# Altium PCB USB_DVI_SW.PcbDoc
Units mil, origin at the board's own origin, x right, y up, seen from the top; angles counter-clockwise.
Board outline 1544.5 x 1455.2 mil, 2 copper layers (Top Layer, Bottom Layer); 25 components, 19 nets, 116 pads, 89 vias.
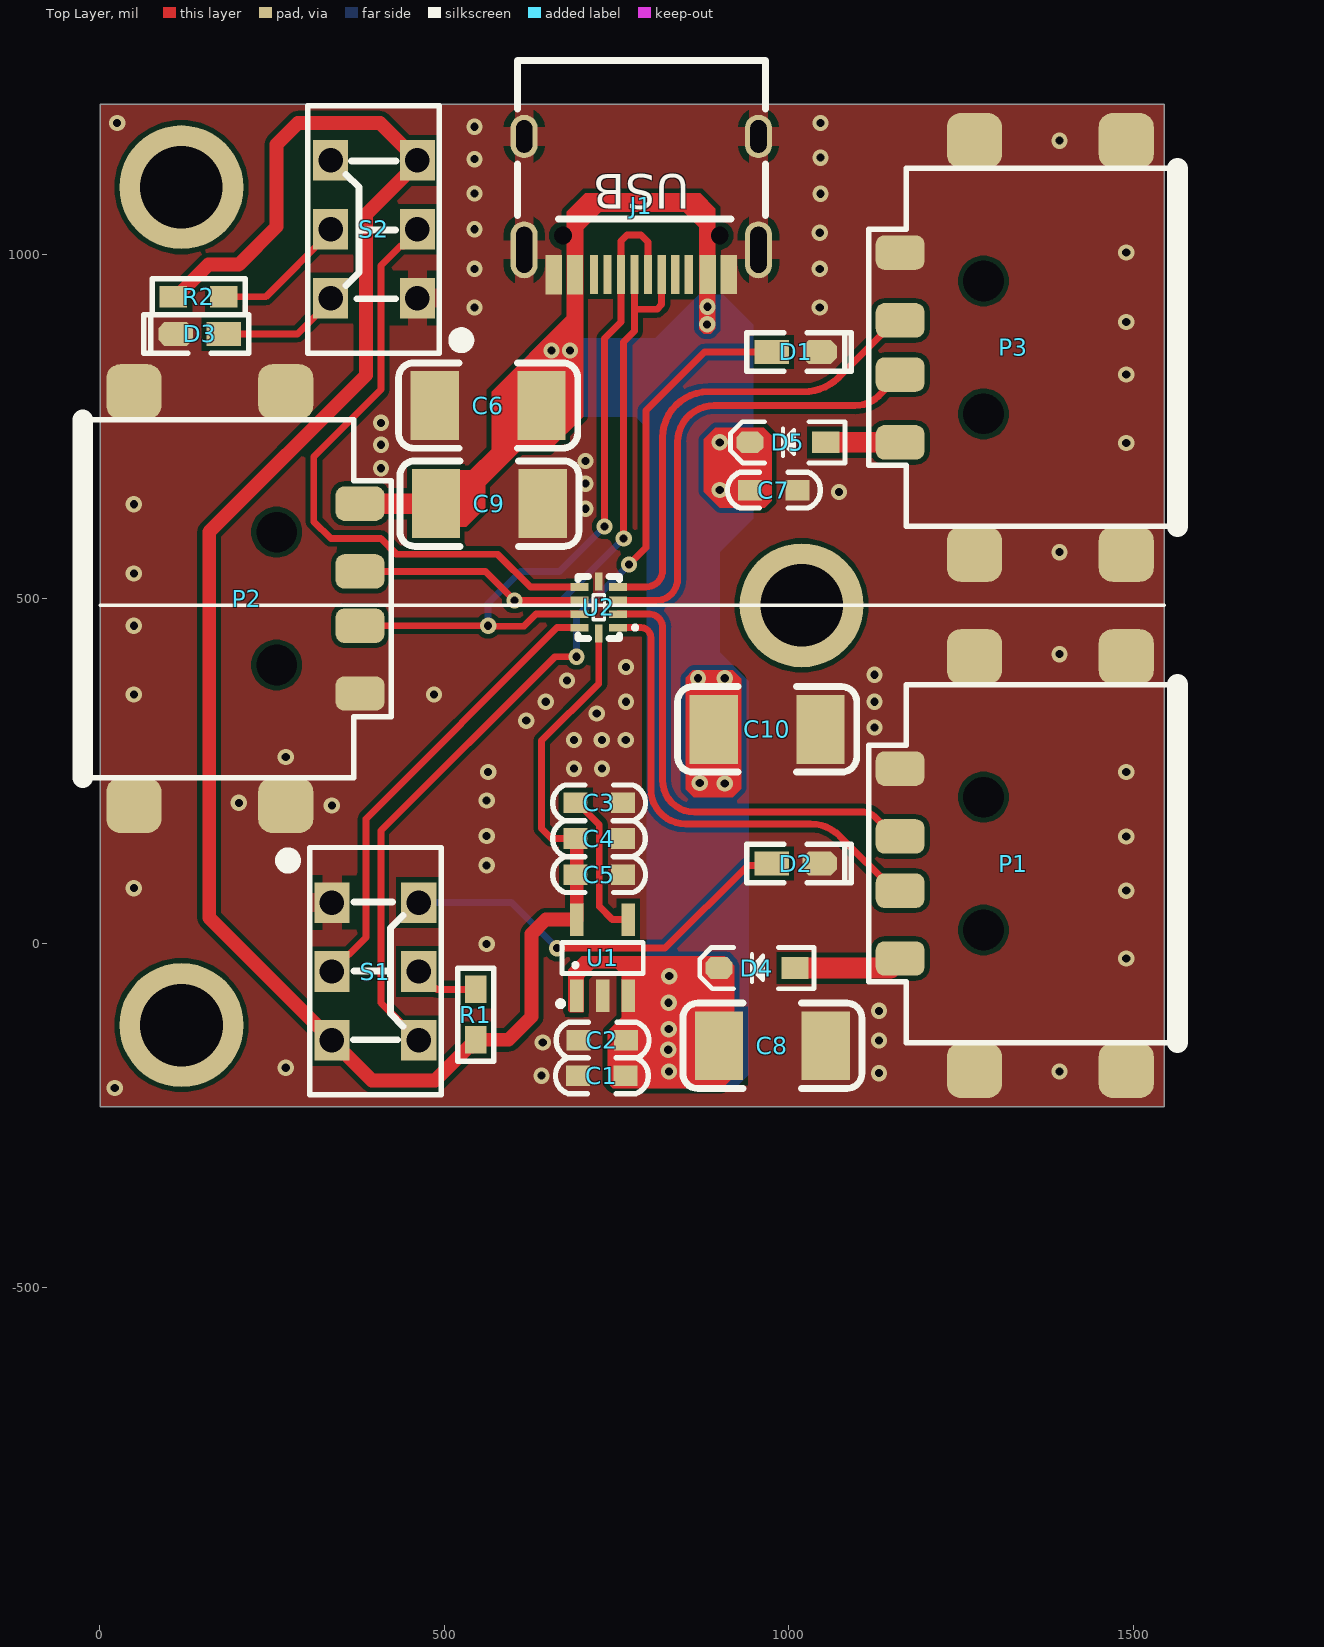
[diagram p0: Top Layer view]
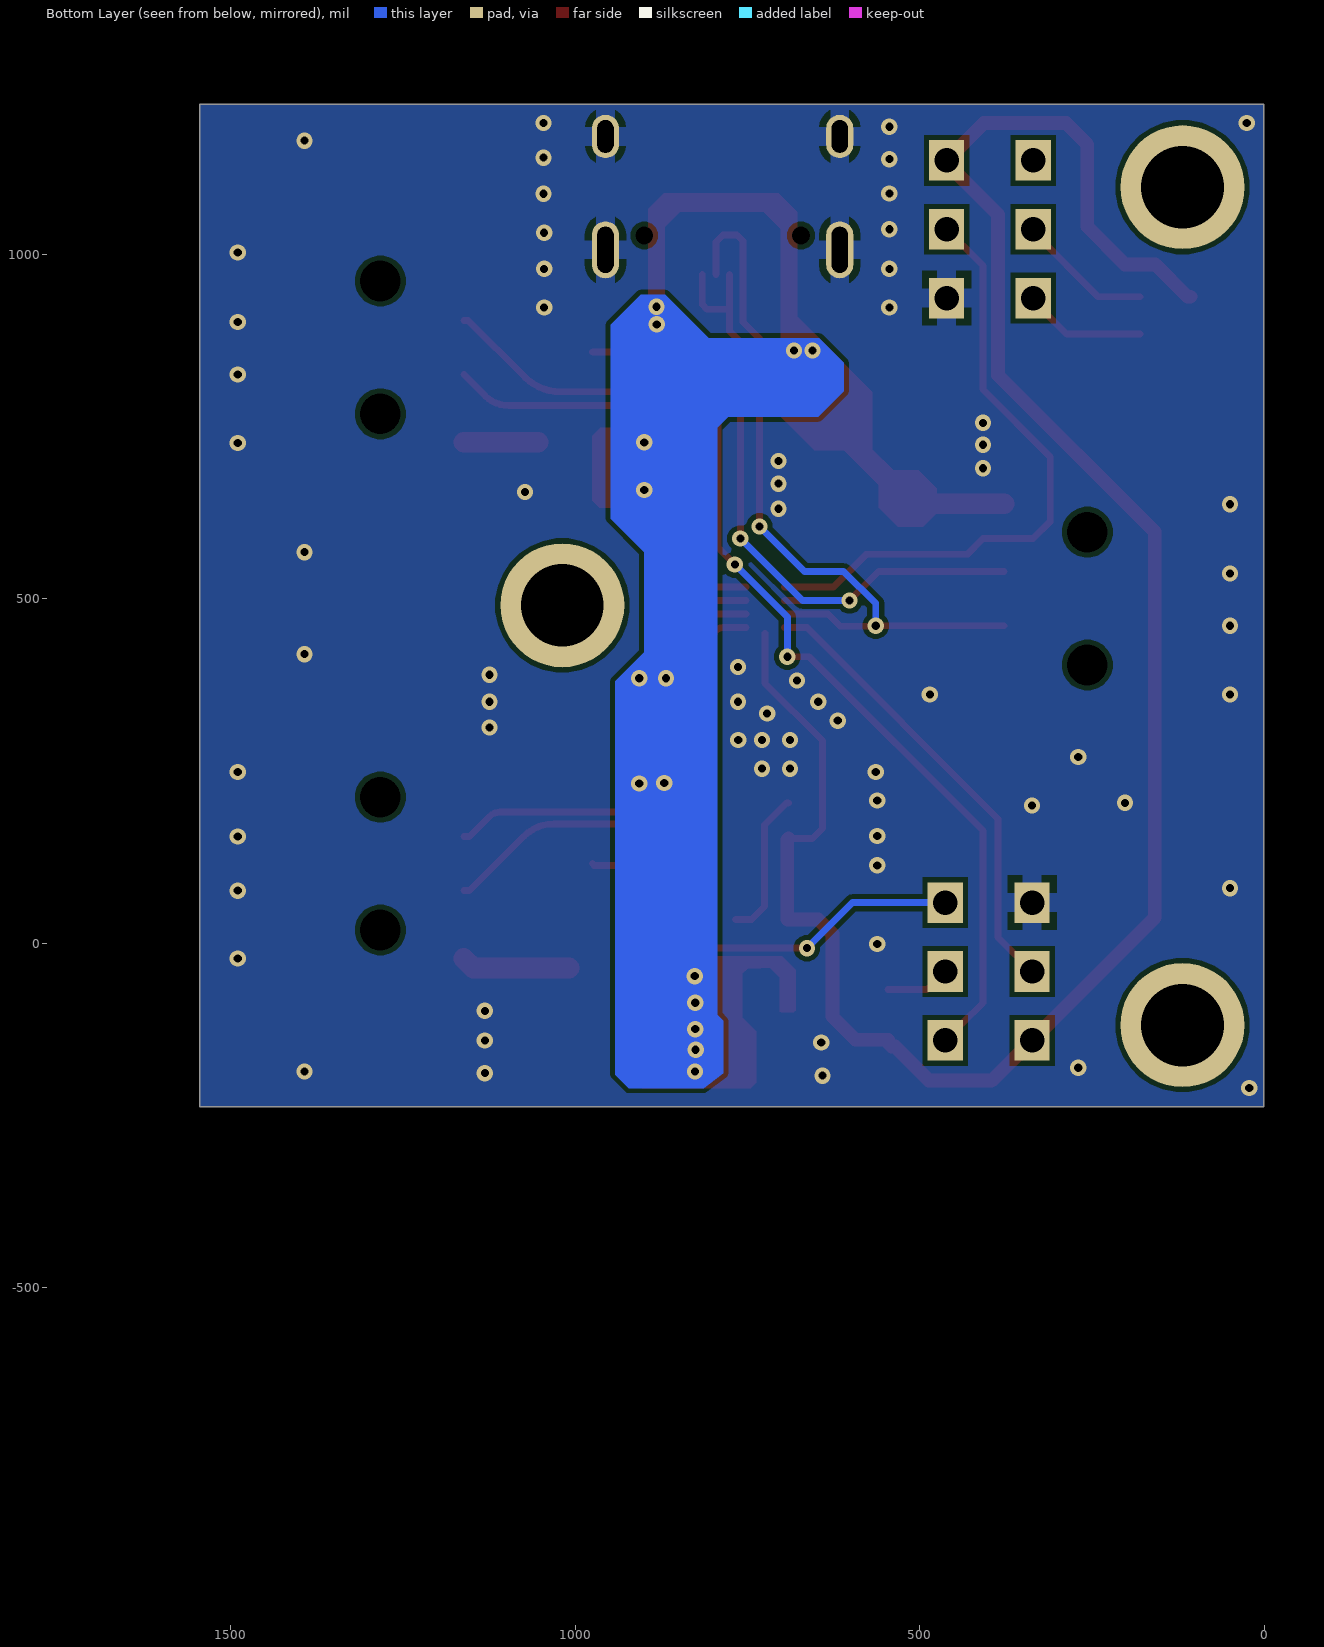
[diagram p1: Bottom Layer view, seen from below]
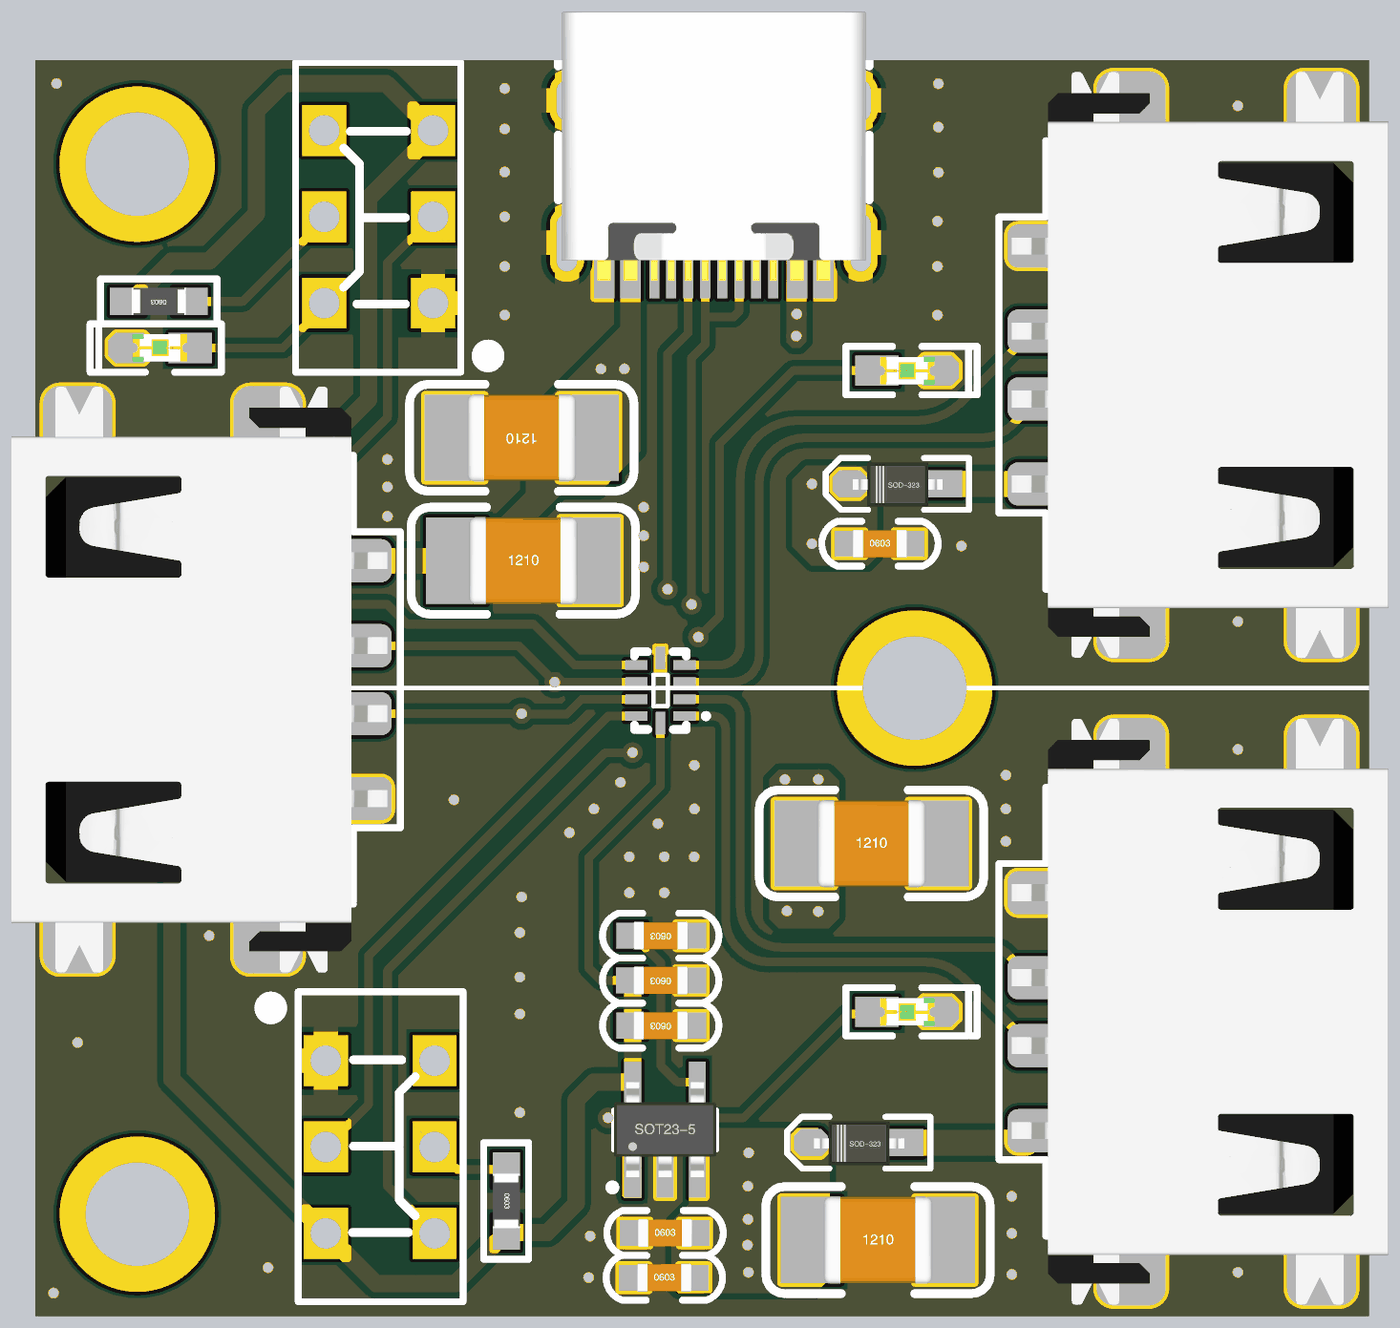
[diagram p2: 3D render of the assembled board from above, using the file's embedded part models]

## Layer stack, top to bottom
Top Solder: solder mask 0.4, Solder Resist, Dk 3.5
Top Layer: signal copper 1.4
Dielectric 1: dielectric 12.6, FR-4, Dk 4.8
Bottom Layer: signal copper 1.4
Bottom Solder: solder mask 0.4, Solder Resist, Dk 3.5

## Board outline
0.5,1024.3 0.5,1218.1 1545,1218.1 1545,-237.1 0.5,-237.1

## Design rules (kind name [scope] priority, off if disabled: settings)
Clearance [All] p1: gap=7 ignorepadtopadclearanceinfootprint=TRUE
PolygonConnect [All] p1: thpad.connectstyle=Relief thpad.reliefconductorwidth=28 thpad.reliefentries=4 thpad.polygonreliefangle="90 Angle" thpad.airgapwidth=10 smdpad.connectstyle=Direct smdpad.reliefconductorwidth=20 smdpad.reliefentries=4 smdpad.polygonreliefangle="90 Angle" smdpad.airgapwidth=7 via.connectstyle=Direct via.reliefconductorwidth=10 via.reliefentries=4 via.polygonreliefangle="90 Angle" via.airgapwidth=10
RoutingVias [All] p1: holewidth=28 width=50 viastyle="Through Hole" minholewidth=28 minwidth=50 maxholewidth=28 maxwidth=50
SolderMaskExpansion [All] p1: expansion=4 istentingtop=FALSE
UnRoutedNet [All] p1: checkbadconnections=TRUE
Width [All] p1: maxlimit=70 minlimit=8 preferedwidth=10 minimp=50.000000 maximp=50.000000 favimp=50.000000
29 further rules are at their usual default settings.

## Components (designator, comment, footprint, x,y, rotation, side; value= is the part's Value field where it differs from the comment)
C1 "106" "C 0603" 728.97,-192.47 r0 top
C2 "104" "C 0603" 729.84,-140.67 r0 top
C3 "Cap" "C 0603" 724.8,203.7 r180 top value=2.2uf
C4 "Cap" "C 0603" 724.7,151.9 r180 top value=104
C5 "Cap" "C 0603" 724.79,99.57 r180 top value=106
C6 "100uF" "C 1210" 563.8,780.5 r180 top value=22uF
C7 "100nf" "C 0603" 978.66,657.74 r0 top
C8 "100uF" "C 1210" 976.4,-148.9 r0 top value=22uF
C9 "100uF" "C 1210" 565.57,638.05 r0 top value=22uF
C10 "100uF" "C 1210" 968.8,310.5 r0 top value=22uF
D1 "LED" "LED 0603B" 1010.2,858.04 r0 top
D2 "LED" "LED 0603B" 1010.2,115.36 r0 top
D3 "LED" "LED 0603B" 145,884.66 r180 top
D4 "Diode 1N914" SOD-323 954.02,-36.09 r180 top
D5 "Diode 1N914" SOD-323 998.78,727.01 r180 top
J1 "USB type C" TYPEC_D 956.26,1171.1 r270 top locked
P1 "USB-A" USB-A 1283.33,116.98 r270 top locked
P2 "USB-A" USB-A 256.3,498.9 r90 top locked
P3 "USB-A" USB-A 1283.33,866.16 r270 top locked
R1 "10k" "R 0603" 545.89,-103.59 r270 top
R2 "10k" "R 0603" 143.5,938.4 r180 top
S1 "SW-DPDT" 单刀双掷开关 408.08,-50.24 r0 top
S2 "SW-DPDT" 单刀双掷开关 389.96,1045.55 r180 top
U1 "SPX3819" SOT23-5N 729.84,-20.86 r0 top
U2 "TS3USB221" UQFN-10_L2.0-W1.5-P0.50-BL 724.7,490 r90 top

## Footprints (in the part's own frame and the unit in brackets; to place one, negate y for a bottom-side part, rotate by r counter-clockwise, add the part's x,y. Pads: shape width x height; smd on the part's side, far side on the other; paste and mask are expansions set on the pad)
"C 0603" [mil] "无极性贴片电容"
  rect 35x30 smd: 1(-35,0) 2(34,0)
  silkscreen extent -67,-26 67,26, body extent -31,-16 31,16, height 32
"C 1210" [mil] "无极性贴片电容"
  rect 70x100 smd: 1(-77.5,0) 2(77.5,0)
  silkscreen extent -130,-62 130,62, body extent -63,-51 63,51, height 60
"LED 0603B" [mil] "蓝色0603LED"
  rect 50x35 smd: 1(-35,0.26)
  oct 50x35 smd: 2(35,0.26)
  silkscreen extent -71,-28 81,28, body extent -31,-16 32,16, height 24
"R 0603" [mil] "1/10W贴片电阻"
  rect 40x31.5 smd: 1(-36.5,0) 2(36.5,0)
  silkscreen extent -68,-26 68,26, body extent -31,-16 32,16, height 16
SOD-323 [mm] "1.8x1.3X0.9mm（长宽高，不包括引脚）"
  rect 1x0.8 smd: 1(-1.4,0)
  oct 1x0.8 smd: 2(1.4,0)
  silkscreen extent -2.11,-0.76 2.11,0.76, body extent -1.34,-0.63 1.31,0.67, height 1
SOT23-5N [mm] "3x1.6x1.1mm(长宽高)"
  rect 0.5x1.2 smd: 1(-0.95,-1.4) 2(0,-1.4) 3(0.95,-1.4) 4(0.95,1.4) 5(-0.95,1.4)
  silkscreen extent -1.63,-1.78 1.5,0.56, body extent -1.5,-1.4 1.5,1.4, height 1.15
TYPEC_D [mm]
  round 0 hole 0.65: 0(3.65,-1.43) 0(3.65,-7.21)
  oval 1.6x1 hole 0.6 slot 1.2 at 0 deg: 1(0,0) 1(0,-8.64)
  oval 2.1x1 hole 0.6 slot 1.7 at 0 deg: 1(4.18,0) 1(4.18,-8.64)
  rect 1.45x0.3 smd: A1(5.092,-0.945) A4(5.092,-1.72) A5(5.092,-3.07) A6(5.092,-4.07) A7(5.092,-4.57) A8(5.092,-2.57) A9(5.1,-6.92) A12(5.1,-7.695) B1(5.1,-7.395) B4(5.1,-6.62) B5(5.092,-6.07) B6(5.092,-5.07) B7(5.092,-3.57) B8(5.092,-5.57) B9(5.092,-2.02) B12(5.092,-1.245)
  silkscreen extent -2.79,-8.89 3.05,0.25, body extent -2.6,-8.79 5.3,0.15, height 3.25
UQFN-10_L2.0-W1.5-P0.50-BL [mm]
  rect 0.28x0.665 smd: 1(-0.811,-0.7) 2(-0.311,-0.7) 3(0.189,-0.7) 4(0.689,-0.7) 6(0.689,0.715) 7(0.189,0.715) 8(-0.311,0.715) 9(-0.811,0.715)
  rect 0.665x0.28 smd: 5(0.896,0.008) 10(-1.019,0.008)
  silkscreen extent -1.2,-1.41 1.08,0.77
USB-A [mm]
  rrect50% 2.032x2.032 smd: 0(-7.591,5.252) 0(-7.591,-0.348) 0(7.659,5.252) 0(7.659,-0.348)
  rrect50% 1.27x1.8 smd: 1(3.534,-3.086) 2(1.034,-3.086) 3(-0.966,-3.086) 4(-3.466,-3.086)
  round 0.6 hole 1.5 unplated: MH1(-2.416,-0.01) MH2(2.484,-0.01)
  silkscreen extent -6.57,-4.24 6.63,7.14, body extent -8.58,-3.86 8.65,7.2, height 6.4
单刀双掷开关 [mm]
  rect 1.3x1.5 hole 0.9: 1(-1.806,2.772) 2(-1.806,0.232) 3(-1.806,-2.308) 4(1.394,-2.308) 5(1.394,0.232) 6(1.394,2.772)
  silkscreen extent -3.6,-4.32 2.23,4.8, body extent -1.98,-4.27 1.62,4.73, height 5.5

## Part data
C1 C2: library part 0603C
C3 C4 C5: "Polarized Capacitor (Radial)", Published=8-Jun-2000, Publisher="Altium Limited", Revision="July-2002: Re-released for DXP Platform."
C6 C8 C9 C10: library part "Cap Pol1", "贴片电解电容", LatestRevisionDate=17-Jul-2002, LatestRevisionNote="Re-released for DXP Platform.", PackageDescription="Polarized Capacitor (Radial); 2 Leads", PackageReference=RB7.6-15, Published=8-Jun-2000, Publisher="Altium Limited"
C7: library part Cap, "贴片电容", LatestRevisionDate=17-Jul-2002, LatestRevisionNote="Re-released for DXP Platform.", PackageDescription="Radial Cap, Thru-Hole; 2 Leads; 0.3 in Pin Spacing", PackageReference=RAD-0.3, Published=8-Jun-2000, Publisher="Altium Limited"
D4 D5: "High Conductance Fast Diode", Code_JEDEC=DO-204-AH, ComponentLink1Description="Manufacturer Link", ComponentLink1URL=http://www.fairchildsemi.com/, ComponentLink2Description=Datasheet, ComponentLink2URL=http://www.fairchildsemi.com/ds/1N%2F1N4448.pdf, DatasheetVersion=1997, LatestRevisionDate=17-Jul-2002, LatestRevisionNote="Re-released for DXP Platform.", PackageDescription="Diode, Axial; Body 3.8 x 1.9 mm (LxDia. max), Lead Dia. 0.53 mm (max)", PackageReference=DO-35, Published=8-Jun-2000, Publisher="Altium Limited"
J1: "USB type C 16P"
R1 R2: library part Res1, "贴片电阻", LatestRevisionDate=17-Jul-2002, LatestRevisionNote="Re-released for DXP Platform.", PackageDescription="Axial Device, Thru-Hole; 2 Leads; 0.3 in Pin Spacing", PackageReference=AXIAL-0.3, Published=8-Jun-2000, Publisher="Altium Limited"
S1 S2: "Double-Pole, Double-Throw Switch", LatestRevisionDate=17-Jul-2002, LatestRevisionNote="Re-released for DXP Platform.", PackageDescription="Switch; 6 Leads", PackageReference=DPDT-6, Published=24-Mar-1999, Publisher="Altium Limited"
U1: library part RT9193-33, "3.3V超低压差LDO"

## Free pads (board coordinates)
  round 180 hole 120: 2(118.5,1097.4) 2(118.7,-118.9) 2(1018.9,490.5)

## Via types
v1: diameter 23.62, hole 11.81, Top Layer to Bottom Layer, tented both sides, 89 vias

## Nets (pads, with @x,y where several pads share a name; then routed paths per layer and width w, separated by ;. In a path a pad name is that pad's centre, name@x,y a point inside that pad or via, vN(x,y) a via of type N, cw(c..) or ccw(c..) an arc to the next point about the centre after c; other vN are vias at no path point)
DM_IN: J1.A7 J1.B7 P2.2 U2.7 | length 1007.5
  Top Layer w10: P2.2 559.81,539.63 v1(602,497.44) U2.7 ; v1(760.47,587.46) 760.47,872.82 776.34,888.7 776.34,920.22 ; J1.A7 776.34,920.22 ; J1.B7 815.71,927.1 808.84,920.22 776.34,920.22
  Bottom Layer w10: v1(602,497.44) 670.45,497.44 v1(760.47,587.46)
DM_O1: P1.2 U2.1 | length 704.2
  Top Layer w10: U2.1 785.56,458.07 cw(c785.56,443.67) 799.96,443.67 799.96,223.64 ccw(c850.38,223.64) 850.38,173.22 1031.79,173.22 cw(c1031.79,113.32) 1074.12,155.7 ; 1074.15,155.68 1153.58,76.25 P1.2
DM_O2: P3.2 U2.3 | length 672.9
  Top Layer w10: U2.3 807.54,497.44 ccw(c807.54,528.7) 838.8,528.7 838.8,727.3 cw(c892,727.3) 892,780.5 1096.54,780.5 ccw(c1096.54,829.64) 1131.29,794.89 P3.2
DP_IN: J1.A6 J1.B6 P2.3 U2.8 | length 1092.8
  Top Layer w10: P2.3 v1(563.8,460.89) 563.8,460.17 615.73,460.17 633.31,477.75 U2.8 ; v1(732.7,604.96) 732.7,877.96 756.66,901.92 J1.B6 756.66,1019.26 765.61,1028.21 785.56,1028.21 796.03,1017.74 J1.A6
  Bottom Layer w10: v1(563.8,460.89) 563.8,492.91 610.51,539.63 667.37,539.63 v1(732.7,604.96)
DP_O1: P1.3 U2.2 | length 682.6
  Top Layer w10: U2.2 797.61,477.75 cw(c797.61,458.41) 816.96,458.41 816.96,236.65 ccw(c863.39,236.65) 863.39,190.22 1109.5,190.22 cw(c1109.5,169.03) 1124.48,184.02 1153.51,154.99 P1.3
DP_O2: P3.3 U2.4 | length 693.9
  Top Layer w10: U2.4 792.92,517.12 ccw(c792.92,541.17) 816.96,541.17 816.96,734.07 cw(c883.34,734.07) 883.34,800.45 1021.7,800.45 ccw(c1021.7,872.98) 1072.96,821.68 ; 1072.98,821.7 1155.46,904.17 P3.3
GND: C1.1 C2.1 C3.1 C4.1 C5.1 C6.2 C7.2 C8.2 C9.2 C10.2 D1.2 D2.2 D3.2 J1.1 J1.A1 J1.A12 J1.B1 J1.B12 P1.0 P1.4 P2.0 P2.4 P3.0 P3.4 S1.1 S2.1 U1.2 U2.5
  other v1: 21.7,-210.2 641.3,-192.26 1131.29,-188.64 1393.17,-186.2 270.01,-180.73 643.07,-144.22 1131.29,-141.09 1131.29,-98.2 1490.1,-22.18 561.64,-1.18 1490.1,76.25 49.53,79.89 561.64,113.06 561.64,155.7 1490.1,154.99 336.96,200.06 201.9,203.7 561.64,207.27 563.8,248.6 1490.1,248.6 688.41,253.41 728.96,253.41 270.01,270.44 688.41,295.1 728.86,295.1 763.5,295.1 1124.48,312.96 619.1,323.1 721.5,333.6 647.41,350.56 763.84,350.56 1124.48,350.56 49.53,361.09 485.3,361.09 678.1,381.37 1124.48,389.7 763.84,401.11 1393.17,419.56 49.53,460.89 49.53,536.56 1393.17,567.67 705.11,630.75 49.53,637.22 1072.96,655.12 705.11,667.07 408.34,689.47 705.02,700.05 408.34,723.5 1490.1,726.01 408.34,755.37 1490.1,825.43 1490.1,901.92 544.11,922.65 1045.21,922.65 544.11,978.95 1045.21,978.95 1490.1,1002.6 1045.21,1031.34 544.11,1036.43 544.11,1088.3 1046.3,1087.85 544.11,1138.12 1046.3,1140.34 1393.17,1165 544.11,1185.1 1046.3,1190.66 25.23,1190.79
NetC3_2: C3.2 U1.4 | length 216.2
  Top Layer w10: C3.2 693.3,203.7 725.1,171.9 725.1,53.1 743.95,34.25 U1.4
NetD1_1: D1.1 S1.4 | length 1334.4
  Top Layer w10: S1.4 462.94,-137.15 442.35,-116.56 438.41,-116.56 408.34,-86.49 408.34,163.26 660.9,415.82 v1(692.15,415.82) ; v1(768.4,549.6) 792.92,574.12 792.92,773.21 878.01,858.3 D1.1
  Bottom Layer w10: v1(692.15,415.82) 692.15,473.35 v1(768.4,549.6)
NetD2_1: D2.1 S1.6 | length 590.5
  Top Layer w10: v1(663.78,-7.2) 820.8,-7.2 941.06,113.06 972.65,113.06 D2.1
  Bottom Layer w10: S1.6 597.67,58.91 v1(663.78,-7.2)
NetD3_1: D3.1 S2.6 | length 178.9
  Top Layer w10: D3.1 287.04,884.4 335.1,932.46 S2.6
NetD4_1: D4.1 P1.1 | length 158.5
  Top Layer w30: D4.1 1147.92,-36.09 P1.1
NetD5_1: D5.1 P3.1 | length 107.9
  Top Layer w30: D5.1 P3.1
NetR1_1: R1.1 S1.5 | length 96
  Top Layer w10: S1.5 462.94,-45.03 483.53,-65.62 487.92,-65.62 489.39,-67.09 R1.1
NetR2_1: R2.1 S2.5 | length 198
  Top Layer w10: R2.1 241.04,938.4 335.1,1032.46 S2.5
OE: S2.2 U2.6 | length 914.1
  Top Layer w10: S2.2 461.08,1032.46 440.49,1011.87 436.56,1011.87 408.34,983.66 408.34,803.62 310.57,705.85 310.57,612.37 335.49,587.46 407.96,587.46 430.81,564.61 577.58,564.61 625.06,517.12 U2.6
SEL: S1.2 U2.9 | length 669.6
  Top Layer w10: S1.2 336.96,-37.15 357.55,-16.56 361.49,-16.56 386.34,8.3 386.34,180.64 663.78,458.07 U2.9
VBUS: C1.2 C2.2 C6.1 C7.1 C8.1 C9.1 C10.1 D4.2 D5.2 J1.0 J1.A4 J1.A9 J1.B4 J1.B9 P2.1 U1.1 U1.3 | length 110.3
  Top Layer w30: P2.1 C9.1
  other v1: 826.3,-186.2 825.3,-154.7 825.9,-124.8 825.8,-86.4 826.6,-47.8 870.9,232.4 907.2,231.8 868.5,384.7 907.24,384.7 899.96,657.74 899.96,727.01 655.62,860.23 682.59,860.23 881.7,898.3 882.2,923.9
VC3V3: C4.2 C5.2 R1.2 R2.2 S1.3 S2.3 U1.5 U2.10 | length 3075.8
  Top Layer w10: C4.2 656.03,151.9 641.3,166.63 641.3,294.03 724.4,377.13 U2.10
  Top Layer w20: R2.2 111.25,938.4 158.05,985.2 201.9,985.2 256.7,1040 256.7,1159.62 287.86,1190.79 406.7,1190.79 441.56,1155.93 445.49,1155.93 461.08,1140.34 S2.3 461.08,1132.46 386.34,1057.72 386.34,824.46 158.78,596.9 158.78,37.08 317.43,-121.56 321.37,-121.56 336.96,-137.15 S1.3 336.96,-145.03 352.55,-160.62 356.49,-160.62 395.36,-199.49 486.49,-199.49 535.89,-150.09 540.14,-150.09 545.89,-144.34 R1.2 593.53,-140.09 626.79,-106.83 626.79,13.64 647.41,34.25 U1.5 692.44,150.16 C4.2
pads on no net: J1.A5 J1.A8 J1.B5 J1.B8 P1.MH1 P1.MH2 P2.MH1 P2.MH2 P3.MH1 P3.MH2 S2.4

## Polygon pours and split planes (outlines as drawn)
GND on Bottom Layer "GND_L02_P000" (solid, remove dead copper, pour order 0): 0.5,1218.1 0.5,-237.1 1545,-237.1 1545,1218.1
GND on Top Layer "GND_L01_P001" (solid, remove dead copper, pour order 1): 0.5,1218.1 0.5,-237.1 1545,-237.1 1545,1218.1

## Other copper
Top Layer:
  region net VBUS: 729.8,-36.1 716.9,-36.1 702.9,-50.1 702.9,-99.3 701.7,-100.5 682.6,-100.5 680.3,-98.2 680.3,-38.3 699.4,-19.2 907.2,-19.2 920.9,-32.9 920.9,-193.2 903.6,-210.5 745,-210.5 737.3,-202.8 737.3,-127.5 757.4,-107.4 757.4,-44.7 748.74,-36.04 729.94,-36.04
  region net VBUS: 850.4,362.5 850.4,385.46 861,396.06 919.05,396.06 931.5,383.61 931.5,224.52 919.05,212.08 861.95,212.08 850.38,223.64 850.38,384.7
  region net VBUS: 893.5,748.5 876.74,731.74 876.74,655.12 899.65,632.2 965.16,632.2 975.21,642.25 975.21,736.69 963.8,748.1
  region net VBUS: 876.7,884.6 886.7,884.6 893.8,891.7 893.8,1066.2 871.7,1088.3 704.7,1088.3 678.1,1061.7 678.1,909.8 568.7,800.4 568.7,716.8 538.1,686.2 501.4,686.2 475.6,660.4 475.6,624.1 495,604.7 532,604.7 559.5,632.2 559.5,664.7 610.4,715.6 652.8,715.6 701.7,764.5 701.7,1036.16 727.24,1061.7 847.67,1061.7 870.1,1039.27 870.1,891.2
Bottom Layer:
  region net VBUS: 819.1,723.5 778.3,764.3 647.41,764.3 610.51,801.2 610.51,842.5 645.97,877.96 806.16,877.96 844.1,915.9 864.1,915.9 882.2,897.8 882.2,749.45 855.58,722.82 854.9,723.5 825.3,723.5
  region net VBUS: 813.84,-210.2 922.7,-210.2 942.3,-190.6 942.3,380.2 899.96,422.54 899.96,567.66 948.78,616.48 948.78,897.72 905.2,941.3 869.5,941.3 844.1,915.9 844.1,814.3 794.1,764.3 794.1,-104.1 785.3,-112.9 785.3,-188.64

## Silkscreen, mask and mechanical layers (free items; w line width, h text height)
Top Overlay:
  lines w5: 0.5,490.5 1545,490.5
Mechanical 1:
  lines w5: 0.5,-237.1 0.5,1218.1 1545,1218.1 1545,-237.1 0.5,-237.1

## Text inside footprints (layer, text, board x,y; h text height)
J1: Top Overlay "USB" at 856.18,1116.1 h50 r180